# Altium PCB KUOZHAN.PCBDOC (part 4 of 21)
Units mm, origin at the board's own origin, x right, y up, seen from the top; angles counter-clockwise.
Board outline 165.51 x 116.38 mm, 2 copper layers (Top Layer, Bottom Layer); 171 components, 245 nets, 894 pads, 298 vias.
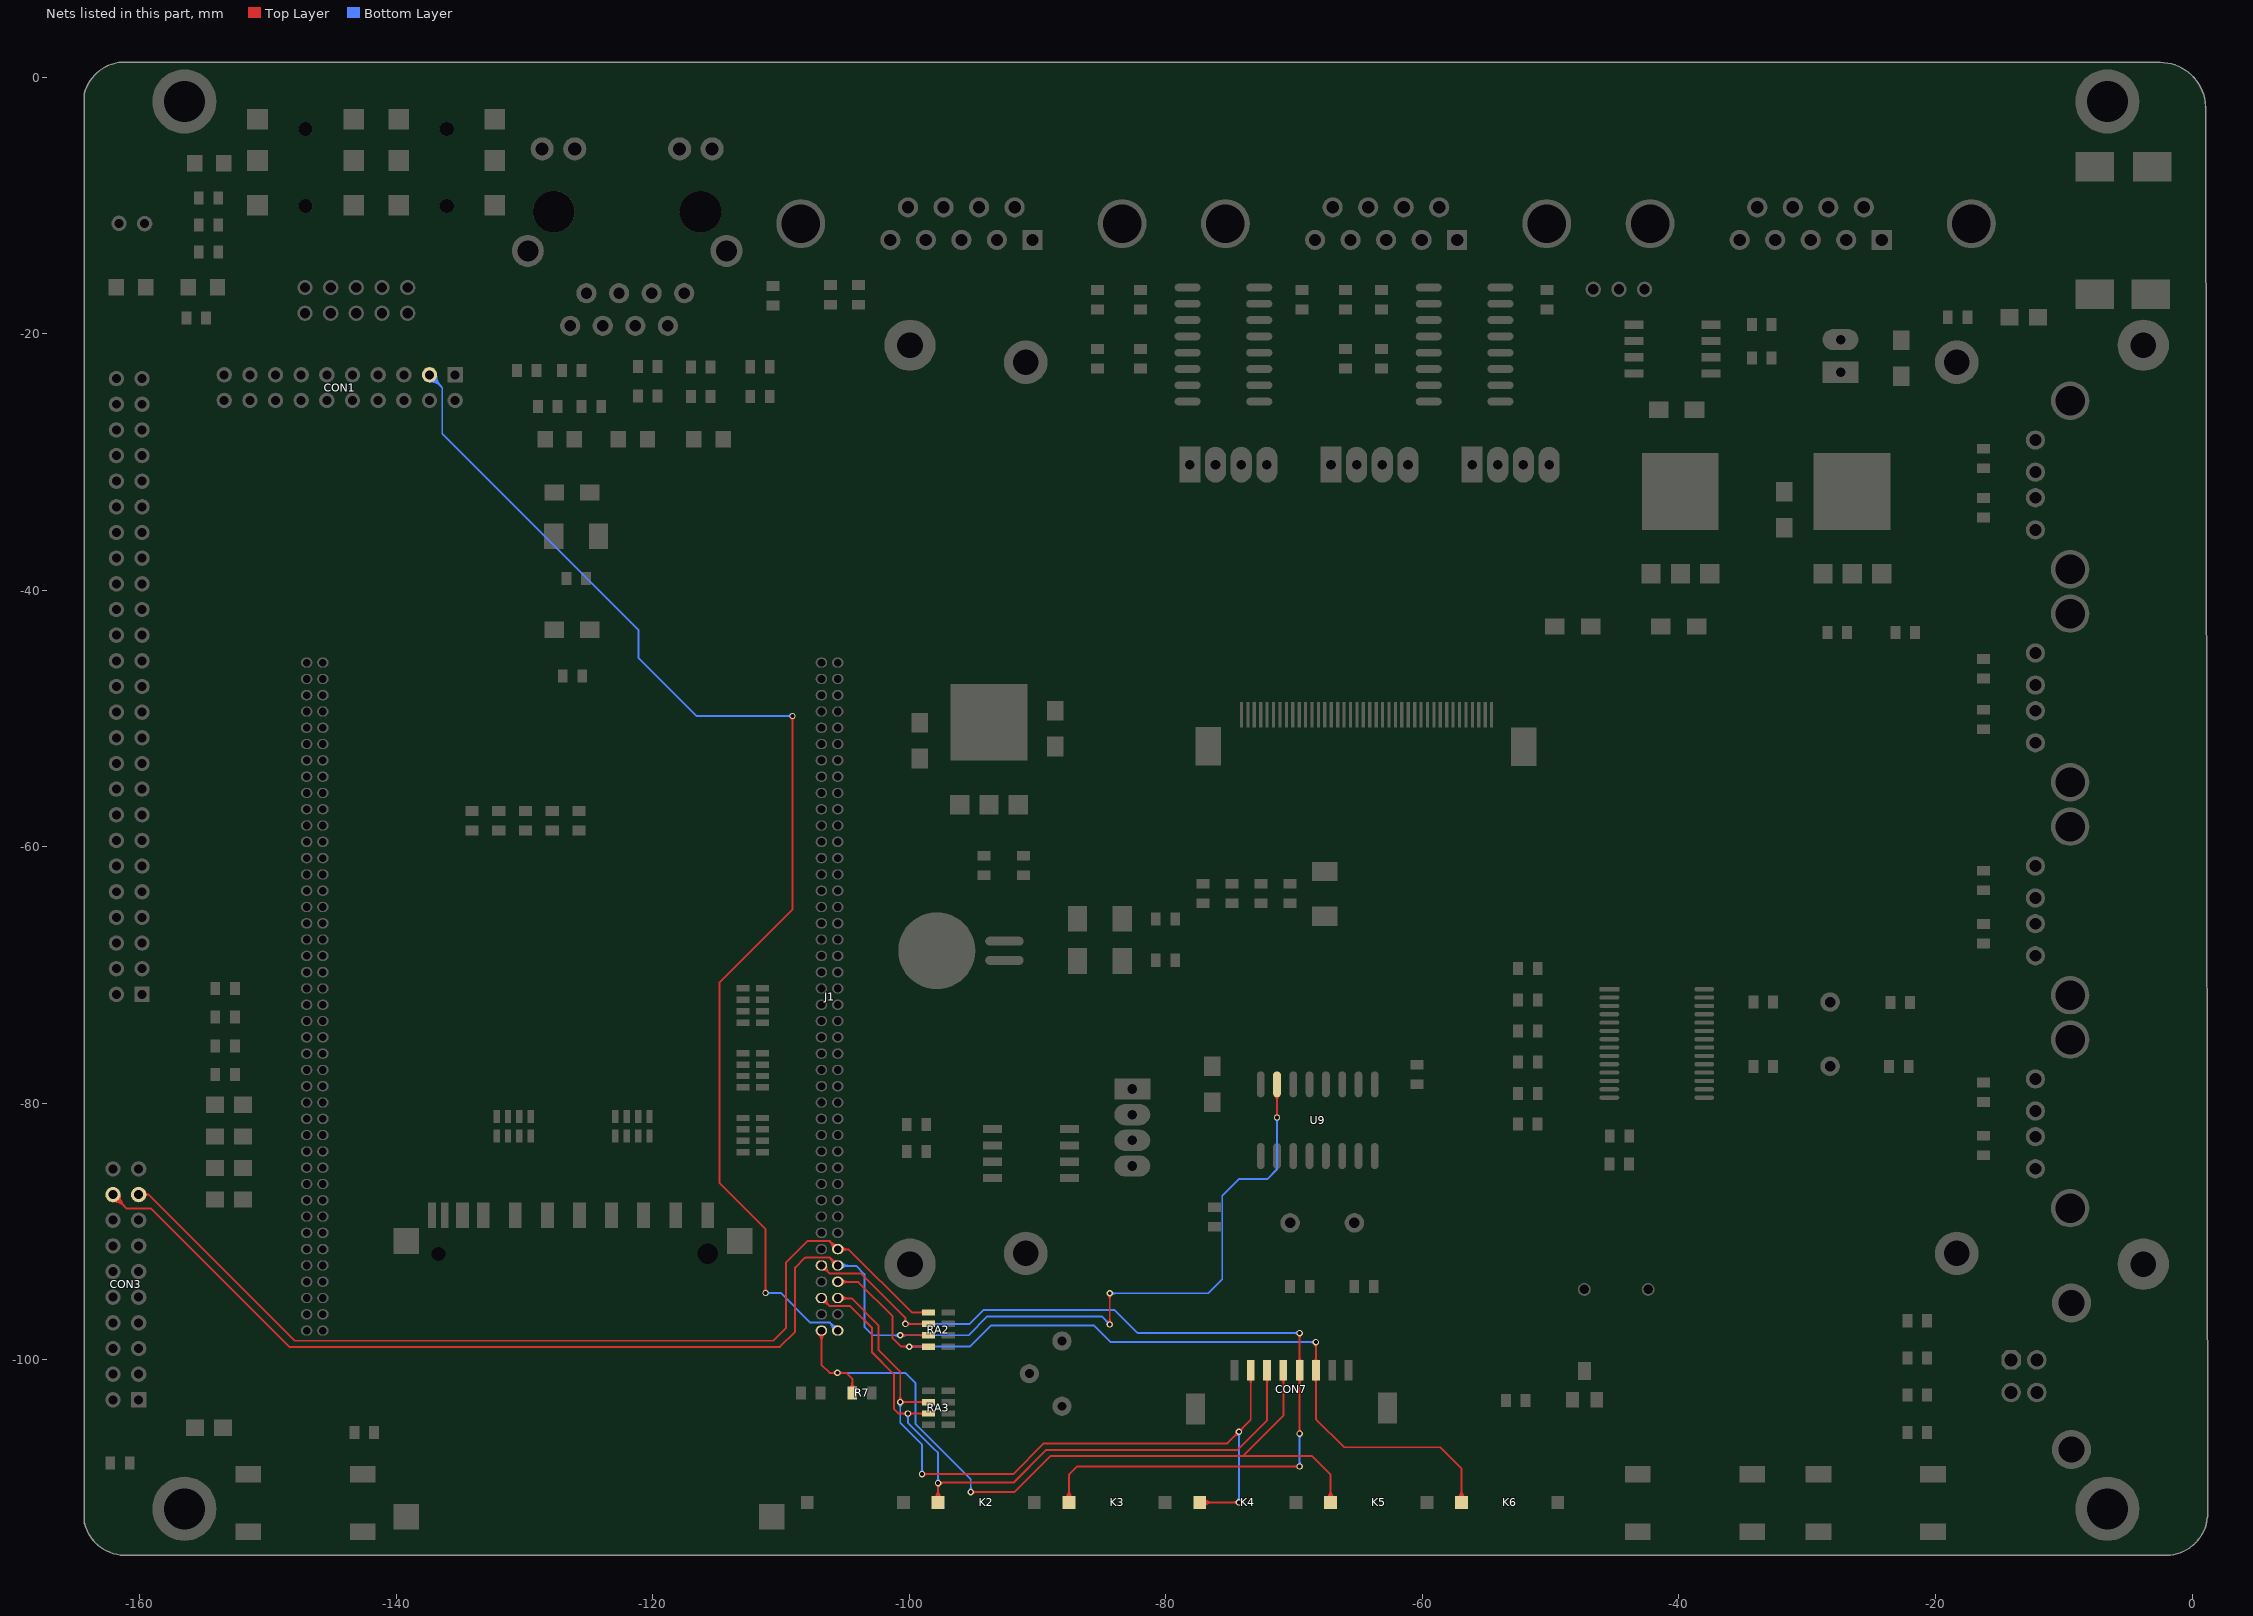
[diagram p4: the nets of this part, all layers, seen from the top]

## Via types
v1: diameter 0.5, hole 0.3, Top Layer to Bottom Layer, 272 vias
v2: diameter 0.6, hole 0.3, Top Layer to Bottom Layer, 24 vias
v3: diameter 0.9, hole 0.9, Top Layer to Bottom Layer, 2 vias

## Nets (pads, with @x,y where several pads share a name; then routed paths per layer and width w, separated by ;. In a path a pad name is that pad's centre, name@x,y a point inside that pad or via, vN(x,y) a via of type N, cw(c..) or ccw(c..) an arc to the next point about the centre after c; other vN are vias at no path point) (continued)
EINT11: CON7.3 J1.79 K2.1 RA3.3 | length 81.2
  Top Layer w0.15: J1.79@-106.841,-95.169 -106.21,-95.8 -104.6,-95.8 -104.478,-95.922 ; -104.551,-95.849 -104.478,-95.922 ; v1@-100.188,-104.262 ccw(c-100.402,-104.476) -100.402,-104.174 ccw(c-100.402,-103.872) v1@-100.188,-104.086 ; v1@-100.012,-104.262 cw(c-99.798,-104.476) -99.798,-104.174 cw(c-99.798,-103.872) v1@-100.012,-104.086 ; RA3.3@-98.48,-104.174 v1(-100.1,-104.174) -100.826,-104.174 -101.2,-103.8 -101.2,-101.1 -102.9,-99.4 -102.9,-97.5 -104.478,-95.922 ; K2.1@-98.051,-110.799 ccw(c-98.776,-110.074) -97.75,-110.074 ccw(c-96.724,-110.074) K2.1@-97.449,-110.799 ; K2.1@-97.944,-110.906 ccw(c-98.414,-110.436) -97.75,-110.436 ccw(c-97.086,-110.436) K2.1@-97.556,-110.906 ; v1@-97.874,-109.724 cw(c-98.172,-110.022) -97.75,-110.022 cw(c-97.328,-110.022) -97.626,-109.724 cw(c-97.207,-110.143) -97.207,-109.55 ; K2.1@-97.75,-111.1 -97.75,-109.55 -91.85,-109.55 -89.3,-107 -74.4,-107 -72.105,-104.705 CON7.3@-72.105,-100.788 ; v1@-97.626,-109.476 ccw(c-97.448,-109.298) -97.448,-109.55 ; J1.79@-106.841,-95.378 cw(c-106.841,-95.8) -106.542,-95.501 ; J1.79@-106.841,-95.378 cw(c-106.841,-95.8) -106.542,-95.501 ; J1.79@-106.841,-95.378 cw(c-106.841,-95.8) -106.542,-95.501 ; J1.79@-106.666,-95.203 ccw(c-106.243,-95.203) -106.542,-95.501 ; J1.79@-106.666,-95.203 ccw(c-106.243,-95.203) -106.542,-95.501 ; J1.79@-106.666,-95.203 ccw(c-106.243,-95.203) -106.542,-95.501 ; -100.522,-104.174 cw(c-100.522,-104.597) v1@-100.224,-104.298 ; -100.522,-104.174 ccw(c-100.522,-103.752) v1@-100.224,-104.05 ; -100.522,-104.174 cw(c-100.522,-104.597) v1@-100.224,-104.298 ; -100.522,-104.174 ccw(c-100.522,-103.752) v1@-100.224,-104.05 ; -100.522,-104.174 cw(c-100.522,-104.597) v1@-100.224,-104.298 ; -100.522,-104.174 ccw(c-100.522,-103.752) v1@-100.224,-104.05 ; -100.522,-104.174 ccw(c-100.522,-103.752) v1@-100.224,-104.05 ; -100.522,-104.174 cw(c-100.522,-104.597) v1@-100.224,-104.298 ; v1@-99.976,-104.298 cw(c-99.678,-104.597) -99.678,-104.174 ; v1@-99.976,-104.298 cw(c-99.678,-104.597) -99.678,-104.174 ; v1@-99.976,-104.298 cw(c-99.678,-104.597) -99.678,-104.174 ; v1@-99.976,-104.298 cw(c-99.678,-104.597) -99.678,-104.174 ; v1@-99.976,-104.05 ccw(c-99.678,-103.752) -99.678,-104.174 ; v1@-99.976,-104.05 ccw(c-99.678,-103.752) -99.678,-104.174 ; v1@-99.976,-104.05 ccw(c-99.678,-103.752) -99.678,-104.174 ; v1@-99.976,-104.05 ccw(c-99.678,-103.752) -99.678,-104.174 ; -99.161,-104.174 cw(c-99.161,-104.597) RA3.3@-98.862,-104.298 ; -99.161,-104.174 ccw(c-99.161,-103.752) RA3.3@-98.862,-104.05 ; -99.161,-104.174 cw(c-99.161,-104.597) RA3.3@-98.862,-104.298 ; -99.161,-104.174 ccw(c-99.161,-103.752) RA3.3@-98.862,-104.05 ; -99.161,-104.174 cw(c-99.161,-104.597) RA3.3@-98.862,-104.298 ; -99.161,-104.174 ccw(c-99.161,-103.752) RA3.3@-98.862,-104.05 ; -99.161,-104.174 cw(c-99.161,-104.597) RA3.3@-98.862,-104.298 ; -99.161,-104.174 ccw(c-99.161,-103.752) RA3.3@-98.862,-104.05 ; -99.161,-104.174 ccw(c-99.161,-103.752) RA3.3@-98.862,-104.05 ; -99.161,-104.174 cw(c-99.161,-104.597) RA3.3@-98.862,-104.298 ; CON7.3@-72.264,-101.447 cw(c-72.648,-101.831) -72.105,-101.831 ; CON7.3@-72.264,-101.447 cw(c-72.648,-101.831) -72.105,-101.831 ; CON7.3@-72.264,-101.447 cw(c-72.648,-101.831) -72.105,-101.831 ; CON7.3@-72.264,-101.447 cw(c-72.648,-101.831) -72.105,-101.831 ; CON7.3@-72.264,-101.447 cw(c-72.648,-101.831) -72.105,-101.831 ; -72.105,-101.831 cw(c-71.562,-101.831) CON7.3@-71.946,-101.447 ; -72.105,-101.831 cw(c-71.562,-101.831) CON7.3@-71.946,-101.447 ; -72.105,-101.831 cw(c-71.562,-101.831) CON7.3@-71.946,-101.447 ; -72.105,-101.831 cw(c-71.562,-101.831) CON7.3@-71.946,-101.447 ; -72.105,-101.831 cw(c-71.562,-101.831) CON7.3@-71.946,-101.447 ; J1.79@-106.791,-95.494 cw(c-106.791,-96.158) -106.321,-95.689 ccw(c-106.791,-96.158) J1.79@-106.791,-95.494 ; J1.79@-106.616,-95.177 ccw(c-106.14,-95.196) -106.477,-95.533 cw(c-106.14,-95.196) J1.79@-106.616,-95.177 ; J1.79@-106.466,-95.183 ccw(c-105.676,-95.216) -106.235,-95.775 cw(c-105.676,-95.216) J1.79@-106.466,-95.183
  Bottom Layer w0.15: v1@-100.188,-104.262 cw(c-100.402,-104.476) -100.1,-104.476 cw(c-99.798,-104.476) v1@-100.012,-104.262 ; v1(-100.1,-104.174) -100.1,-104.9 -98.1,-106.9 -97.75,-107.25 v1(-97.75,-109.6) ; v1@-97.874,-109.476 ccw(c-98.172,-109.178) -97.75,-109.178 ccw(c-97.328,-109.178) v1@-97.626,-109.476 ; v1@-100.224,-104.298 cw(c-100.522,-104.597) -100.1,-104.597 ; v1@-100.224,-104.298 cw(c-100.522,-104.597) -100.1,-104.597 ; v1@-100.224,-104.298 cw(c-100.522,-104.597) -100.1,-104.597 ; v1@-100.224,-104.298 cw(c-100.522,-104.597) -100.1,-104.597 ; -100.1,-104.597 cw(c-99.678,-104.597) v1@-99.976,-104.298 ; -100.1,-104.597 cw(c-99.678,-104.597) v1@-99.976,-104.298 ; -100.1,-104.597 cw(c-99.678,-104.597) v1@-99.976,-104.298 ; -100.1,-104.597 cw(c-99.678,-104.597) v1@-99.976,-104.298
EINT13: CON7.5 J1.75 K3.1 RA2.2 | length 111.3
  Top Layer w0.15: J1.75@-106.841,-92.629 -106.196,-93.274 -103.726,-93.274 -100.3,-96.7 v1(-100.3,-97.185) RA2.2@-98.48,-97.185 ; v1@-100.388,-97.097 ccw(c-100.602,-96.883) -100.3,-96.883 ccw(c-99.998,-96.883) -100.212,-97.097 ccw(c-99.998,-96.883) -99.998,-97.185 ccw(c-99.998,-97.487) v1@-100.212,-97.273 ; K3.1@-87.851,-110.799 ccw(c-88.576,-110.074) -87.55,-110.074 ccw(c-86.524,-110.074) K3.1@-87.249,-110.799 ; K3.1@-87.744,-110.906 ccw(c-88.214,-110.436) -87.55,-110.436 ccw(c-86.886,-110.436) K3.1@-87.356,-110.906 ; K3.1@-87.55,-111.1 -87.55,-108.95 -86.9,-108.3 v1(-69.565,-108.3) ; v1@-69.689,-108.424 ccw(c-69.987,-108.722) -69.987,-108.3 ccw(c-69.987,-107.878) v1@-69.689,-108.176 ; v1@-69.689,-105.611 ccw(c-69.987,-105.313) -69.565,-105.313 ccw(c-69.143,-105.313) v1@-69.441,-105.611 ; v1@-69.653,-97.988 cw(c-69.867,-98.202) -69.565,-98.202 cw(c-69.263,-98.202) v1@-69.477,-97.988 ; v1(-69.565,-105.735) CON7.5@-69.565,-100.788 v1(-69.565,-97.9) ; J1.75@-106.841,-92.836 cw(c-106.841,-93.258) -106.542,-92.96 ; J1.75@-106.841,-92.836 cw(c-106.841,-93.258) -106.542,-92.96 ; J1.75@-106.841,-92.836 cw(c-106.841,-93.258) -106.542,-92.96 ; J1.75@-106.666,-92.661 ccw(c-106.243,-92.661) -106.542,-92.96 ; J1.75@-106.666,-92.661 ccw(c-106.243,-92.661) -106.542,-92.96 ; J1.75@-106.666,-92.661 ccw(c-106.243,-92.661) -106.542,-92.96 ; v1@-100.424,-97.061 ccw(c-100.722,-96.763) -100.3,-96.763 ; v1@-100.424,-97.061 ccw(c-100.722,-96.763) -100.3,-96.763 ; v1@-100.424,-97.061 ccw(c-100.722,-96.763) -100.3,-96.763 ; v1@-100.424,-97.061 ccw(c-100.722,-96.763) -100.3,-96.763 ; -100.3,-96.763 ccw(c-99.878,-96.763) v1@-100.176,-97.061 ; -100.3,-96.763 ccw(c-99.878,-96.763) v1@-100.176,-97.061 ; -100.3,-96.763 ccw(c-99.878,-96.763) v1@-100.176,-97.061 ; -100.3,-96.763 ccw(c-99.878,-96.763) v1@-100.176,-97.061 ; v1@-100.176,-97.309 cw(c-99.878,-97.608) -99.878,-97.185 ; v1@-100.176,-97.309 cw(c-99.878,-97.608) -99.878,-97.185 ; v1@-100.176,-97.309 cw(c-99.878,-97.608) -99.878,-97.185 ; v1@-100.176,-97.309 cw(c-99.878,-97.608) -99.878,-97.185 ; v1@-100.176,-97.061 ccw(c-99.878,-96.763) -99.878,-97.185 ; v1@-100.176,-97.061 ccw(c-99.878,-96.763) -99.878,-97.185 ; v1@-100.176,-97.061 ccw(c-99.878,-96.763) -99.878,-97.185 ; v1@-100.176,-97.061 ccw(c-99.878,-96.763) -99.878,-97.185 ; -99.161,-97.185 cw(c-99.161,-97.608) RA2.2@-98.862,-97.309 ; -99.161,-97.185 ccw(c-99.161,-96.763) RA2.2@-98.862,-97.061 ; -99.161,-97.185 cw(c-99.161,-97.608) RA2.2@-98.862,-97.309 ; -99.161,-97.185 ccw(c-99.161,-96.763) RA2.2@-98.862,-97.061 ; -99.161,-97.185 cw(c-99.161,-97.608) RA2.2@-98.862,-97.309 ; -99.161,-97.185 ccw(c-99.161,-96.763) RA2.2@-98.862,-97.061 ; -99.161,-97.185 cw(c-99.161,-97.608) RA2.2@-98.862,-97.309 ; -99.161,-97.185 ccw(c-99.161,-96.763) RA2.2@-98.862,-97.061 ; -99.161,-97.185 ccw(c-99.161,-96.763) RA2.2@-98.862,-97.061 ; -99.161,-97.185 cw(c-99.161,-97.608) RA2.2@-98.862,-97.309 ; CON7.5@-69.724,-101.447 cw(c-70.108,-101.831) -69.565,-101.831 ; CON7.5@-69.724,-101.447 cw(c-70.108,-101.831) -69.565,-101.831 ; CON7.5@-69.724,-101.447 cw(c-70.108,-101.831) -69.565,-101.831 ; CON7.5@-69.724,-101.447 cw(c-70.108,-101.831) -69.565,-101.831 ; CON7.5@-69.724,-101.447 cw(c-70.108,-101.831) -69.565,-101.831 ; CON7.5@-69.724,-100.128 ccw(c-70.108,-99.744) -69.565,-99.744 ; CON7.5@-69.724,-100.128 ccw(c-70.108,-99.744) -69.565,-99.744 ; CON7.5@-69.724,-100.128 ccw(c-70.108,-99.744) -69.565,-99.744 ; CON7.5@-69.724,-100.128 ccw(c-70.108,-99.744) -69.565,-99.744 ; CON7.5@-69.724,-100.128 ccw(c-70.108,-99.744) -69.565,-99.744 ; v1@-69.689,-98.024 cw(c-69.987,-98.322) -69.565,-98.322 ; v1@-69.689,-98.024 cw(c-69.987,-98.322) -69.565,-98.322 ; v1@-69.689,-98.024 cw(c-69.987,-98.322) -69.565,-98.322 ; v1@-69.689,-98.024 cw(c-69.987,-98.322) -69.565,-98.322 ; -69.565,-101.831 cw(c-69.022,-101.831) CON7.5@-69.406,-101.447 ; -69.565,-101.831 cw(c-69.022,-101.831) CON7.5@-69.406,-101.447 ; -69.565,-101.831 cw(c-69.022,-101.831) CON7.5@-69.406,-101.447 ; -69.565,-101.831 cw(c-69.022,-101.831) CON7.5@-69.406,-101.447 ; -69.565,-101.831 cw(c-69.022,-101.831) CON7.5@-69.406,-101.447 ; -69.565,-99.744 ccw(c-69.022,-99.744) CON7.5@-69.406,-100.128 ; -69.565,-99.744 ccw(c-69.022,-99.744) CON7.5@-69.406,-100.128 ; -69.565,-99.744 ccw(c-69.022,-99.744) CON7.5@-69.406,-100.128 ; -69.565,-99.744 ccw(c-69.022,-99.744) CON7.5@-69.406,-100.128 ; -69.565,-99.744 ccw(c-69.022,-99.744) CON7.5@-69.406,-100.128 ; -69.565,-98.322 cw(c-69.143,-98.322) v1@-69.441,-98.024 ; -69.565,-98.322 cw(c-69.143,-98.322) v1@-69.441,-98.024 ; -69.565,-98.322 cw(c-69.143,-98.322) v1@-69.441,-98.024 ; -69.565,-98.322 cw(c-69.143,-98.322) v1@-69.441,-98.024 ; J1.75@-106.791,-92.954 cw(c-106.791,-93.618) -106.321,-93.149 ccw(c-106.791,-93.618) J1.75@-106.791,-92.954 ; J1.75@-106.616,-92.633 ccw(c-106.112,-92.646) -106.468,-93.002 cw(c-106.112,-92.646) J1.75@-106.616,-92.633 ; J1.75@-106.466,-92.637 ccw(c-105.629,-92.657) -106.221,-93.249 cw(c-105.629,-92.657) J1.75@-106.466,-92.637
  Bottom Layer w0.15: v1(-100.3,-97.185) -95.285,-97.185 -94.2,-96.1 -84,-96.1 -82.2,-97.9 v1(-69.565,-97.9) ; v1@-100.212,-97.273 cw(c-99.998,-97.487) -99.998,-97.185 cw(c-99.998,-96.883) v1@-100.212,-97.097 ; v1@-69.689,-108.176 ccw(c-69.987,-107.878) -69.565,-107.878 ccw(c-69.143,-107.878) v1@-69.441,-108.176 ; v1@-69.689,-105.859 cw(c-69.987,-106.157) -69.565,-106.157 cw(c-69.143,-106.157) v1@-69.441,-105.859 ; v1@-69.653,-97.988 ccw(c-69.867,-98.202) -69.867,-97.9 ccw(c-69.867,-97.598) v1@-69.653,-97.812 ; v1(-69.565,-108.3) v1(-69.565,-105.735) ; v1@-100.176,-97.309 cw(c-99.878,-97.608) -99.878,-97.185 ; v1@-100.176,-97.309 cw(c-99.878,-97.608) -99.878,-97.185 ; v1@-100.176,-97.309 cw(c-99.878,-97.608) -99.878,-97.185 ; v1@-100.176,-97.309 cw(c-99.878,-97.608) -99.878,-97.185 ; v1@-100.176,-97.061 ccw(c-99.878,-96.763) -99.878,-97.185 ; v1@-100.176,-97.061 ccw(c-99.878,-96.763) -99.878,-97.185 ; v1@-100.176,-97.061 ccw(c-99.878,-96.763) -99.878,-97.185 ; v1@-100.176,-97.061 ccw(c-99.878,-96.763) -99.878,-97.185 ; -69.987,-97.9 cw(c-69.987,-98.322) v1@-69.689,-98.024 ; -69.987,-97.9 ccw(c-69.987,-97.478) v1@-69.689,-97.776 ; -69.987,-97.9 cw(c-69.987,-98.322) v1@-69.689,-98.024 ; -69.987,-97.9 ccw(c-69.987,-97.478) v1@-69.689,-97.776 ; -69.987,-97.9 cw(c-69.987,-98.322) v1@-69.689,-98.024 ; -69.987,-97.9 ccw(c-69.987,-97.478) v1@-69.689,-97.776 ; -69.987,-97.9 ccw(c-69.987,-97.478) v1@-69.689,-97.776 ; -69.987,-97.9 cw(c-69.987,-98.322) v1@-69.689,-98.024
EINT14: CON7.2 J1.80 K4.1 RA3.2 | length 92.3
  Top Layer w0.15: J1.80@-105.571,-95.203 -104.497,-95.203 -102.4,-97.3 -102.4,-99.2 -100.7,-100.9 v1(-100.7,-103.285) RA3.2@-98.48,-103.285 ; v1@-100.788,-103.197 ccw(c-101.002,-102.983) -100.7,-102.983 ccw(c-100.398,-102.983) -100.612,-103.197 ccw(c-100.398,-102.983) -100.398,-103.285 ccw(c-100.398,-103.587) v1@-100.612,-103.373 ; v1(-99,-108.9) -91.9,-108.9 -89.5,-106.5 -75.2,-106.5 -73.375,-104.675 CON7.2@-73.375,-100.788 ; v1@-98.876,-109.024 cw(c-98.578,-109.322) -98.578,-108.9 cw(c-98.578,-108.478) v1@-98.876,-108.776 ; K4.1@-77.35,-111.1 v1(-74.3,-111.1) ; K4.1@-77.156,-111.294 cw(c-76.686,-111.764) -76.686,-111.1 cw(c-76.686,-110.436) K4.1@-77.156,-110.906 ; K4.1@-77.049,-111.401 cw(c-76.324,-112.126) -76.324,-111.1 cw(c-76.324,-110.074) K4.1@-77.049,-110.799 ; v1@-74.474,-105.599 cw(c-74.896,-105.599) -74.597,-105.897 cw(c-74.299,-106.196) v1@-74.299,-105.774 ; v1@-74.424,-111.224 ccw(c-74.722,-111.522) -74.722,-111.1 ccw(c-74.722,-110.678) v1@-74.424,-110.976 ; v1@-74.299,-105.424 ccw(c-74.299,-105.001) -74,-105.3 ccw(c-73.701,-105.599) v1@-74.124,-105.599 ; J1.80@-105.447,-95.326 cw(c-105.148,-95.625) J1.80@-105.148,-95.203 ; J1.80@-105.447,-95.326 cw(c-105.148,-95.625) J1.80@-105.148,-95.203 ; J1.80@-105.447,-95.326 cw(c-105.148,-95.625) J1.80@-105.148,-95.203 ; J1.80@-105.447,-95.079 ccw(c-105.148,-94.78) J1.80@-105.148,-95.203 ; J1.80@-105.447,-95.079 ccw(c-105.148,-94.78) J1.80@-105.148,-95.203 ; J1.80@-105.447,-95.079 ccw(c-105.148,-94.78) J1.80@-105.148,-95.203 ; J1.80@-105.341,-95.432 cw(c-104.786,-95.987) -104.786,-95.203 ; J1.80@-105.341,-95.432 cw(c-104.786,-95.987) -104.786,-95.203 ; J1.80@-105.341,-95.432 cw(c-104.786,-95.987) -104.786,-95.203 ; J1.80@-105.341,-94.973 ccw(c-104.786,-94.418) -104.786,-95.203 ; J1.80@-105.341,-94.973 ccw(c-104.786,-94.418) -104.786,-95.203 ; J1.80@-105.341,-94.973 ccw(c-104.786,-94.418) -104.786,-95.203 ; v1@-100.824,-103.161 ccw(c-101.122,-102.863) -100.7,-102.863 ; v1@-100.824,-103.161 ccw(c-101.122,-102.863) -100.7,-102.863 ; v1@-100.824,-103.161 ccw(c-101.122,-102.863) -100.7,-102.863 ; v1@-100.824,-103.161 ccw(c-101.122,-102.863) -100.7,-102.863 ; -100.7,-102.863 ccw(c-100.278,-102.863) v1@-100.576,-103.161 ; -100.7,-102.863 ccw(c-100.278,-102.863) v1@-100.576,-103.161 ; -100.7,-102.863 ccw(c-100.278,-102.863) v1@-100.576,-103.161 ; -100.7,-102.863 ccw(c-100.278,-102.863) v1@-100.576,-103.161 ; v1@-100.576,-103.409 cw(c-100.278,-103.708) -100.278,-103.285 ; v1@-100.576,-103.409 cw(c-100.278,-103.708) -100.278,-103.285 ; v1@-100.576,-103.409 cw(c-100.278,-103.708) -100.278,-103.285 ; v1@-100.576,-103.409 cw(c-100.278,-103.708) -100.278,-103.285 ; v1@-100.576,-103.161 ccw(c-100.278,-102.863) -100.278,-103.285 ; v1@-100.576,-103.161 ccw(c-100.278,-102.863) -100.278,-103.285 ; v1@-100.576,-103.161 ccw(c-100.278,-102.863) -100.278,-103.285 ; v1@-100.576,-103.161 ccw(c-100.278,-102.863) -100.278,-103.285 ; -99.161,-103.285 cw(c-99.161,-103.708) RA3.2@-98.862,-103.409 ; -99.161,-103.285 ccw(c-99.161,-102.863) RA3.2@-98.862,-103.161 ; -99.161,-103.285 cw(c-99.161,-103.708) RA3.2@-98.862,-103.409 ; -99.161,-103.285 ccw(c-99.161,-102.863) RA3.2@-98.862,-103.161 ; -99.161,-103.285 cw(c-99.161,-103.708) RA3.2@-98.862,-103.409 ; -99.161,-103.285 ccw(c-99.161,-102.863) RA3.2@-98.862,-103.161 ; -99.161,-103.285 cw(c-99.161,-103.708) RA3.2@-98.862,-103.409 ; -99.161,-103.285 ccw(c-99.161,-102.863) RA3.2@-98.862,-103.161 ; -99.161,-103.285 ccw(c-99.161,-102.863) RA3.2@-98.862,-103.161 ; -99.161,-103.285 cw(c-99.161,-103.708) RA3.2@-98.862,-103.409 ; CON7.2@-73.534,-101.447 cw(c-73.918,-101.831) -73.375,-101.831 ; CON7.2@-73.534,-101.447 cw(c-73.918,-101.831) -73.375,-101.831 ; CON7.2@-73.534,-101.447 cw(c-73.918,-101.831) -73.375,-101.831 ; CON7.2@-73.534,-101.447 cw(c-73.918,-101.831) -73.375,-101.831 ; CON7.2@-73.534,-101.447 cw(c-73.918,-101.831) -73.375,-101.831 ; -73.375,-101.831 cw(c-72.832,-101.831) CON7.2@-73.216,-101.447 ; -73.375,-101.831 cw(c-72.832,-101.831) CON7.2@-73.216,-101.447 ; -73.375,-101.831 cw(c-72.832,-101.831) CON7.2@-73.216,-101.447 ; -73.375,-101.831 cw(c-72.832,-101.831) CON7.2@-73.216,-101.447 ; -73.375,-101.831 cw(c-72.832,-101.831) CON7.2@-73.216,-101.447 ; J1.80@-105.397,-95.046 ccw(c-105.018,-94.666) -105.018,-95.203 cw(c-105.018,-94.666) J1.80@-105.397,-95.046 ; J1.80@-105.291,-95.399 cw(c-104.817,-95.873) -104.817,-95.203 ccw(c-104.817,-95.873) J1.80@-105.291,-95.399 ; J1.80@-105.291,-94.939 ccw(c-104.656,-94.304) -104.656,-95.203 cw(c-104.656,-94.304) J1.80@-105.291,-94.939
  Bottom Layer w0.15: v1@-100.788,-103.373 cw(c-101.002,-103.587) -100.7,-103.587 cw(c-100.398,-103.587) v1@-100.612,-103.373 ; v1(-100.7,-103.285) -100.7,-104.9 -99,-106.6 v1(-99,-108.9) ; v1@-99.124,-108.776 ccw(c-99.422,-108.478) -99,-108.478 ccw(c-98.578,-108.478) v1@-98.876,-108.776 ; v1@-74.424,-110.976 ccw(c-74.726,-110.674) -74.299,-110.674 ; v1@-74.422,-105.722 cw(c-74.721,-106.021) -74.299,-106.021 cw(c-73.876,-106.021) v1@-74.175,-105.722 ; v1@-74.299,-111.1 v1(-74.299,-105.599) ; -74.299,-110.681 ccw(c-73.881,-110.681) v1@-74.176,-110.976 ; v1@-100.824,-103.409 cw(c-101.122,-103.708) -100.7,-103.708 ; v1@-100.824,-103.409 cw(c-101.122,-103.708) -100.7,-103.708 ; v1@-100.824,-103.409 cw(c-101.122,-103.708) -100.7,-103.708 ; v1@-100.824,-103.409 cw(c-101.122,-103.708) -100.7,-103.708 ; -100.7,-103.708 cw(c-100.278,-103.708) v1@-100.576,-103.409 ; -100.7,-103.708 cw(c-100.278,-103.708) v1@-100.576,-103.409 ; -100.7,-103.708 cw(c-100.278,-103.708) v1@-100.576,-103.409 ; -100.7,-103.708 cw(c-100.278,-103.708) v1@-100.576,-103.409
EINT15: CON7.4 J1.83 K5.1 R7.2 | length 96.2
  Top Layer w0.15: J1.83@-106.841,-97.744 -106.841,-100.359 -106.2,-101 -104.9,-101 -104.437,-101.463 R7.2@-104.437,-102.56 ; v1@-105.688,-101.088 ccw(c-105.902,-101.302) -105.902,-101 ccw(c-105.902,-100.698) v1@-105.688,-100.912 ; v1@-105.512,-101.088 cw(c-105.298,-101.302) -105.298,-101 cw(c-105.298,-100.698) v1@-105.512,-100.912 ; v1(-95.2,-110.3) -91.8,-110.3 -89,-107.5 -74,-107.5 ; v1@-95.076,-110.424 cw(c-94.778,-110.722) -94.778,-110.3 cw(c-94.778,-109.878) v1@-95.076,-110.176 ; CON7.4@-70.835,-100.788 -70.835,-104.335 -74,-107.5 ; K5.1@-67.451,-110.799 ccw(c-68.176,-110.074) -67.15,-110.074 ccw(c-66.124,-110.074) K5.1@-66.849,-110.799 ; K5.1@-67.344,-110.906 ccw(c-67.814,-110.436) -67.15,-110.436 ccw(c-66.486,-110.436) K5.1@-66.956,-110.906 ; K5.1@-67.15,-111.1 -67.15,-108.95 -68.6,-107.5 -74,-107.5 ; J1.83@-107.071,-97.974 cw(c-107.625,-98.529) -106.841,-98.529 ; J1.83@-107.071,-97.974 cw(c-107.625,-98.529) -106.841,-98.529 ; J1.83@-107.071,-97.974 cw(c-107.625,-98.529) -106.841,-98.529 ; J1.83@-106.965,-97.868 cw(c-107.263,-98.167) -106.841,-98.167 ; J1.83@-106.965,-97.868 cw(c-107.263,-98.167) -106.841,-98.167 ; J1.83@-106.965,-97.868 cw(c-107.263,-98.167) -106.841,-98.167 ; -106.841,-98.529 cw(c-106.056,-98.529) J1.83@-106.611,-97.974 ; -106.841,-98.529 cw(c-106.056,-98.529) J1.83@-106.611,-97.974 ; -106.841,-98.529 cw(c-106.056,-98.529) J1.83@-106.611,-97.974 ; -106.841,-98.494 cw(c-106.056,-98.494) -106.611,-97.939 ccw(c-106.056,-98.494) -106.841,-98.494 ; -106.841,-98.494 ccw(c-107.625,-98.494) -107.071,-97.939 cw(c-107.625,-98.494) -106.841,-98.494 ; -106.841,-98.167 cw(c-106.418,-98.167) J1.83@-106.717,-97.868 ; -106.841,-98.167 cw(c-106.418,-98.167) J1.83@-106.717,-97.868 ; -106.841,-98.167 cw(c-106.418,-98.167) J1.83@-106.717,-97.868 ; -106.841,-98.132 cw(c-106.418,-98.132) -106.717,-97.833 ccw(c-106.418,-98.132) -106.841,-98.132 ; -106.841,-98.132 ccw(c-107.263,-98.132) -106.965,-97.833 cw(c-107.263,-98.132) -106.841,-98.132 ; -106.022,-101 cw(c-106.022,-101.422) v1@-105.724,-101.124 ; -106.022,-101 ccw(c-106.022,-100.578) v1@-105.724,-100.876 ; -106.022,-101 cw(c-106.022,-101.422) v1@-105.724,-101.124 ; -106.022,-101 ccw(c-106.022,-100.578) v1@-105.724,-100.876 ; -106.022,-101 cw(c-106.022,-101.422) v1@-105.724,-101.124 ; -106.022,-101 ccw(c-106.022,-100.578) v1@-105.724,-100.876 ; -106.022,-101 ccw(c-106.022,-100.578) v1@-105.724,-100.876 ; -106.022,-101 cw(c-106.022,-101.422) v1@-105.724,-101.124 ; v1@-105.476,-101.124 cw(c-105.178,-101.422) -105.178,-101 ; v1@-105.476,-101.124 cw(c-105.178,-101.422) -105.178,-101 ; v1@-105.476,-101.124 cw(c-105.178,-101.422) -105.178,-101 ; v1@-105.476,-101.124 cw(c-105.178,-101.422) -105.178,-101 ; v1@-105.476,-100.876 ccw(c-105.178,-100.578) -105.178,-101 ; v1@-105.476,-100.876 ccw(c-105.178,-100.578) -105.178,-101 ; v1@-105.476,-100.876 ccw(c-105.178,-100.578) -105.178,-101 ; v1@-105.476,-100.876 ccw(c-105.178,-100.578) -105.178,-101 ; R7.2@-104.653,-102.216 ccw(c-105.175,-101.694) -104.437,-101.694 ; R7.2@-104.653,-102.216 ccw(c-105.175,-101.694) -104.437,-101.694 ; R7.2@-104.653,-102.216 ccw(c-105.175,-101.694) -104.437,-101.694 ; R7.2@-104.653,-102.216 ccw(c-105.175,-101.694) -104.437,-101.694 ; R7.2@-104.653,-102.216 ccw(c-105.175,-101.694) -104.437,-101.694 ; -104.437,-101.694 ccw(c-103.698,-101.694) R7.2@-104.22,-102.216 ; -104.437,-101.694 ccw(c-103.698,-101.694) R7.2@-104.22,-102.216 ; -104.437,-101.694 ccw(c-103.698,-101.694) R7.2@-104.22,-102.216 ; -104.437,-101.694 ccw(c-103.698,-101.694) R7.2@-104.22,-102.216 ; -104.437,-101.694 ccw(c-103.698,-101.694) R7.2@-104.22,-102.216 ; CON7.4@-70.994,-101.447 cw(c-71.378,-101.831) -70.835,-101.831 ; CON7.4@-70.994,-101.447 cw(c-71.378,-101.831) -70.835,-101.831 ; CON7.4@-70.994,-101.447 cw(c-71.378,-101.831) -70.835,-101.831 ; CON7.4@-70.994,-101.447 cw(c-71.378,-101.831) -70.835,-101.831 ; CON7.4@-70.994,-101.447 cw(c-71.378,-101.831) -70.835,-101.831 ; -70.835,-101.831 cw(c-70.292,-101.831) CON7.4@-70.676,-101.447 ; -70.835,-101.831 cw(c-70.292,-101.831) CON7.4@-70.676,-101.447 ; -70.835,-101.831 cw(c-70.292,-101.831) CON7.4@-70.676,-101.447 ; -70.835,-101.831 cw(c-70.292,-101.831) CON7.4@-70.676,-101.447 ; -70.835,-101.831 cw(c-70.292,-101.831) CON7.4@-70.676,-101.447
  Bottom Layer w0.15: v1(-105.6,-101) -100.3,-101 -99.5,-101.8 -99.5,-105 -98,-106.5 -95.2,-109.3 v1(-95.2,-110.3) ; v1@-105.512,-101.088 cw(c-105.298,-101.302) -105.298,-101 cw(c-105.298,-100.698) v1@-105.512,-100.912 ; v1@-95.324,-110.176 ccw(c-95.622,-109.878) -95.2,-109.878 ccw(c-94.778,-109.878) v1@-95.076,-110.176 ; v1@-105.476,-101.124 cw(c-105.178,-101.422) -105.178,-101 ; v1@-105.476,-101.124 cw(c-105.178,-101.422) -105.178,-101 ; v1@-105.476,-101.124 cw(c-105.178,-101.422) -105.178,-101 ; v1@-105.476,-101.124 cw(c-105.178,-101.422) -105.178,-101 ; v1@-105.476,-100.876 ccw(c-105.178,-100.578) -105.178,-101 ; v1@-105.476,-100.876 ccw(c-105.178,-100.578) -105.178,-101 ; v1@-105.476,-100.876 ccw(c-105.178,-100.578) -105.178,-101 ; v1@-105.476,-100.876 ccw(c-105.178,-100.578) -105.178,-101
EINT17: CON3.17 J1.74 RA2.1 | length 103.7
  Top Layer w0.15: CON3.17@-160.067,-87.106 -159.294,-87.106 ; -107.944,-90.744 -109.6,-92.4 -109.6,-97.5 -110.6,-98.5 -147.9,-98.5 -159.294,-87.106 ; -107.914,-90.714 -106.216,-90.714 J1.74@-105.571,-91.359 ; -106.217,-90.744 -105.571,-91.39 -104.71,-91.39 -99.804,-96.296 RA2.1@-98.48,-96.296 ; CON3.17@-159.58,-87.3 cw(c-159.294,-87.414) -159.294,-87.106 ; CON3.17@-159.58,-87.3 cw(c-159.294,-87.414) -159.294,-87.106 ; CON3.17@-159.58,-87.3 cw(c-159.294,-87.414) -159.294,-87.106 ; CON3.17@-159.58,-87.3 cw(c-159.294,-87.414) -159.294,-87.106 ; CON3.17@-159.58,-87.3 cw(c-159.294,-87.414) -159.294,-87.106 ; CON3.17@-159.58,-86.912 ccw(c-159.294,-86.799) -159.294,-87.106 ; CON3.17@-159.58,-86.912 ccw(c-159.294,-86.799) -159.294,-87.106 ; CON3.17@-159.58,-86.912 ccw(c-159.294,-86.799) -159.294,-87.106 ; CON3.17@-159.58,-86.912 ccw(c-159.294,-86.799) -159.294,-87.106 ; CON3.17@-159.58,-86.912 ccw(c-159.294,-86.799) -159.294,-87.106 ; -106.126,-90.835 cw(c-106.68,-91.39) J1.74@-105.896,-91.39 ; -106.126,-90.835 ccw(c-105.571,-90.28) J1.74@-105.571,-91.065 ; -106.126,-90.835 cw(c-106.68,-91.39) J1.74@-105.896,-91.39 ; -106.126,-90.835 ccw(c-105.571,-90.28) J1.74@-105.571,-91.065 ; -106.126,-90.835 cw(c-106.68,-91.39) J1.74@-105.896,-91.39 ; -106.126,-90.835 ccw(c-105.571,-90.28) J1.74@-105.571,-91.065 ; J1.74@-105.946,-91.359 ccw(c-106.851,-91.359) -106.211,-90.719 cw(c-106.851,-91.359) J1.74@-105.946,-91.359 ; J1.74@-105.946,-91.359 ccw(c-106.777,-91.359) -106.189,-90.772 cw(c-106.777,-91.359) J1.74@-105.946,-91.359 ; J1.74@-105.87,-91.091 cw(c-106.168,-91.39) J1.74@-105.746,-91.39 ; J1.74@-105.87,-91.091 ccw(c-105.571,-90.793) J1.74@-105.571,-91.215 ; J1.74@-105.87,-91.091 cw(c-106.168,-91.39) J1.74@-105.746,-91.39 ; J1.74@-105.87,-91.091 ccw(c-105.571,-90.793) J1.74@-105.571,-91.215 ; J1.74@-105.87,-91.091 cw(c-106.168,-91.39) J1.74@-105.746,-91.39 ; J1.74@-105.87,-91.091 ccw(c-105.571,-90.793) J1.74@-105.571,-91.215 ; J1.74@-105.796,-91.359 ccw(c-106.339,-91.359) -105.955,-90.975 cw(c-106.339,-91.359) J1.74@-105.796,-91.359 ; J1.74@-105.796,-91.359 ccw(c-106.265,-91.359) -105.933,-91.028 cw(c-106.265,-91.359) J1.74@-105.796,-91.359 ; J1.74@-105.621,-91.034 cw(c-105.621,-90.37) -106.09,-90.84 ccw(c-105.621,-90.37) J1.74@-105.621,-91.034 ; J1.74@-105.621,-91.034 cw(c-105.621,-90.296) -106.143,-90.818 ccw(c-105.621,-90.296) J1.74@-105.621,-91.034 ; J1.74@-105.447,-91.514 cw(c-105.148,-91.813) J1.74@-105.148,-91.39 ; J1.74@-105.447,-91.514 cw(c-105.148,-91.813) J1.74@-105.148,-91.39 ; J1.74@-105.447,-91.514 cw(c-105.148,-91.813) J1.74@-105.148,-91.39 ; J1.74@-105.447,-91.266 ccw(c-105.148,-90.968) J1.74@-105.148,-91.39 ; J1.74@-105.447,-91.266 ccw(c-105.148,-90.968) J1.74@-105.148,-91.39 ; J1.74@-105.447,-91.266 ccw(c-105.148,-90.968) J1.74@-105.148,-91.39 ; J1.74@-105.341,-91.62 cw(c-104.786,-92.175) -104.786,-91.39 ; J1.74@-105.341,-91.62 cw(c-104.786,-92.175) -104.786,-91.39 ; J1.74@-105.341,-91.62 cw(c-104.786,-92.175) -104.786,-91.39 ; J1.74@-105.341,-91.16 ccw(c-104.786,-90.605) -104.786,-91.39 ; J1.74@-105.341,-91.16 ccw(c-104.786,-90.605) -104.786,-91.39 ; J1.74@-105.341,-91.16 ccw(c-104.786,-90.605) -104.786,-91.39 ; -99.161,-96.296 cw(c-99.161,-96.719) RA2.1@-98.862,-96.42 ; -99.161,-96.296 ccw(c-99.161,-95.874) RA2.1@-98.862,-96.172 ; -99.161,-96.296 cw(c-99.161,-96.719) RA2.1@-98.862,-96.42 ; -99.161,-96.296 ccw(c-99.161,-95.874) RA2.1@-98.862,-96.172 ; -99.161,-96.296 cw(c-99.161,-96.719) RA2.1@-98.862,-96.42 ; -99.161,-96.296 ccw(c-99.161,-95.874) RA2.1@-98.862,-96.172 ; -99.161,-96.296 cw(c-99.161,-96.719) RA2.1@-98.862,-96.42 ; -99.161,-96.296 ccw(c-99.161,-95.874) RA2.1@-98.862,-96.172 ; -99.161,-96.296 ccw(c-99.161,-95.874) RA2.1@-98.862,-96.172 ; -99.161,-96.296 cw(c-99.161,-96.719) RA2.1@-98.862,-96.42 ; J1.74@-105.392,-91.241 ccw(c-105.052,-90.928) -105.052,-91.39 cw(c-105.052,-90.928) J1.74@-105.392,-91.241 ; J1.74@-105.291,-91.589 cw(c-104.81,-92.07) -104.81,-91.39 ccw(c-104.81,-92.07) J1.74@-105.291,-91.589 ; J1.74@-105.282,-91.139 ccw(c-104.71,-90.613) -104.71,-91.39 cw(c-104.71,-90.613) J1.74@-105.282,-91.139
EINT18: CON3.18 J1.76 RA2.3 U9.15 | length 180.5
  Top Layer w0.15: CON3.18@-162.067,-87.106 -160.974,-88.2 -159.1,-88.2 -148.319,-98.981 -110.081,-98.981 -108.9,-97.8 -108.9,-92.8 -108.136,-92.036 ; -108.1,-92 -106.2,-92 J1.76@-105.571,-92.629 ; -106.196,-92.036 J1.76@-105.571,-92.661 ; v1(-100.7,-98.074) RA2.3@-98.48,-98.074 ; v1@-100.612,-98.162 cw(c-100.398,-98.376) -100.398,-98.074 cw(c-100.398,-97.772) v1@-100.612,-97.986 ; v1@-84.489,-97.111 ccw(c-84.788,-96.812) -84.366,-96.812 ccw(c-83.943,-96.812) v1@-84.242,-97.111 ; v1@-84.489,-94.924 cw(c-84.788,-95.222) -84.366,-95.222 cw(c-83.943,-95.222) v1@-84.242,-94.924 ; v1(-84.366,-97.234) v1(-84.366,-94.8) ; U9.15@-71.492,-79.386 cw(c-71.885,-79.778) -71.33,-79.778 cw(c-70.775,-79.778) U9.15@-71.168,-79.386 ; v1@-71.454,-80.976 ccw(c-71.752,-80.678) -71.33,-80.678 ccw(c-70.908,-80.678) v1@-71.206,-80.976 ; v1(-71.33,-81.1) U9.15@-71.33,-78.512 ; CON3.18@-162.067,-87.631 cw(c-162.067,-88.899) -161.171,-88.003 ; CON3.18@-162.067,-87.631 cw(c-162.067,-88.899) -161.171,-88.003 ; CON3.18@-162.067,-87.631 cw(c-162.067,-88.899) -161.171,-88.003 ; CON3.18@-162.067,-87.631 cw(c-162.067,-88.899) -161.171,-88.003 ; CON3.18@-162.067,-87.631 cw(c-162.067,-88.899) -161.171,-88.003 ; CON3.18@-162.067,-87.481 cw(c-162.067,-88.387) -161.427,-87.747 ; CON3.18@-162.067,-87.481 cw(c-162.067,-88.387) -161.427,-87.747 ; CON3.18@-162.067,-87.481 cw(c-162.067,-88.387) -161.427,-87.747 ; CON3.18@-162.067,-87.481 cw(c-162.067,-88.387) -161.427,-87.747 ; CON3.18@-162.067,-87.481 cw(c-162.067,-88.387) -161.427,-87.747 ; CON3.18@-161.692,-87.106 ccw(c-160.787,-87.106) -161.427,-87.747 ; CON3.18@-161.692,-87.106 ccw(c-160.787,-87.106) -161.427,-87.747 ; CON3.18@-161.692,-87.106 ccw(c-160.787,-87.106) -161.427,-87.747 ; CON3.18@-161.692,-87.106 ccw(c-160.787,-87.106) -161.427,-87.747 ; CON3.18@-161.692,-87.106 ccw(c-160.787,-87.106) -161.427,-87.747 ; CON3.18@-161.542,-87.106 ccw(c-160.275,-87.106) -161.171,-88.003 ; CON3.18@-161.542,-87.106 ccw(c-160.275,-87.106) -161.171,-88.003 ; CON3.18@-161.542,-87.106 ccw(c-160.275,-87.106) -161.171,-88.003 ; CON3.18@-161.542,-87.106 ccw(c-160.275,-87.106) -161.171,-88.003 ; CON3.18@-161.542,-87.106 ccw(c-160.275,-87.106) -161.171,-88.003 ; -106.126,-92.106 cw(c-106.68,-92.661) J1.76@-105.896,-92.661 ; -106.126,-92.106 ccw(c-105.571,-91.551) J1.76@-105.571,-92.336 ; -106.126,-92.106 cw(c-106.68,-92.661) J1.76@-105.896,-92.661 ; -106.126,-92.106 ccw(c-105.571,-91.551) J1.76@-105.571,-92.336 ; -106.126,-92.106 cw(c-106.68,-92.661) J1.76@-105.896,-92.661 ; -106.126,-92.106 ccw(c-105.571,-91.551) J1.76@-105.571,-92.336 ; J1.76@-105.946,-92.629 ccw(c-106.851,-92.629) -106.211,-91.989 cw(c-106.851,-92.629) J1.76@-105.946,-92.629 ; J1.76@-105.946,-92.629 ccw(c-106.775,-92.629) -106.189,-92.043 cw(c-106.775,-92.629) J1.76@-105.946,-92.629 ; J1.76@-105.87,-92.362 cw(c-106.168,-92.661) J1.76@-105.746,-92.661 ; J1.76@-105.87,-92.362 ccw(c-105.571,-92.063) J1.76@-105.571,-92.486 ; J1.76@-105.87,-92.362 cw(c-106.168,-92.661) J1.76@-105.746,-92.661 ; J1.76@-105.87,-92.362 ccw(c-105.571,-92.063) J1.76@-105.571,-92.486 ; J1.76@-105.87,-92.362 cw(c-106.168,-92.661) J1.76@-105.746,-92.661 ; J1.76@-105.87,-92.362 ccw(c-105.571,-92.063) J1.76@-105.571,-92.486 ; J1.76@-105.796,-92.629 ccw(c-106.339,-92.629) -105.955,-92.245 cw(c-106.339,-92.629) J1.76@-105.796,-92.629 ; J1.76@-105.796,-92.629 ccw(c-106.263,-92.629) -105.933,-92.299 cw(c-106.263,-92.629) J1.76@-105.796,-92.629 ; J1.76@-105.621,-92.304 cw(c-105.621,-91.64) -106.09,-92.11 ccw(c-105.621,-91.64) J1.76@-105.621,-92.304 ; J1.76@-105.621,-92.304 cw(c-105.621,-91.564) -106.144,-92.087 ccw(c-105.621,-91.564) J1.76@-105.621,-92.304 ; v1@-100.576,-98.198 cw(c-100.278,-98.497) -100.278,-98.074 ; v1@-100.576,-98.198 cw(c-100.278,-98.497) -100.278,-98.074 ; v1@-100.576,-98.198 cw(c-100.278,-98.497) -100.278,-98.074 ; v1@-100.576,-98.198 cw(c-100.278,-98.497) -100.278,-98.074 ; v1@-100.576,-97.95 ccw(c-100.278,-97.652) -100.278,-98.074 ; v1@-100.576,-97.95 ccw(c-100.278,-97.652) -100.278,-98.074 ; v1@-100.576,-97.95 ccw(c-100.278,-97.652) -100.278,-98.074 ; v1@-100.576,-97.95 ccw(c-100.278,-97.652) -100.278,-98.074 ; -99.161,-98.074 cw(c-99.161,-98.497) RA2.3@-98.862,-98.198 ; -99.161,-98.074 ccw(c-99.161,-97.652) RA2.3@-98.862,-97.95 ; -99.161,-98.074 cw(c-99.161,-98.497) RA2.3@-98.862,-98.198 ; -99.161,-98.074 ccw(c-99.161,-97.652) RA2.3@-98.862,-97.95 ; -99.161,-98.074 cw(c-99.161,-98.497) RA2.3@-98.862,-98.198 ; -99.161,-98.074 ccw(c-99.161,-97.652) RA2.3@-98.862,-97.95 ; -99.161,-98.074 cw(c-99.161,-98.497) RA2.3@-98.862,-98.198 ; -99.161,-98.074 ccw(c-99.161,-97.652) RA2.3@-98.862,-97.95 ; -99.161,-98.074 ccw(c-99.161,-97.652) RA2.3@-98.862,-97.95 ; -99.161,-98.074 cw(c-99.161,-98.497) RA2.3@-98.862,-98.198
  Bottom Layer w0.15: J1.76@-105.571,-92.661 -104.139,-92.661 -103.5,-93.3 -103.5,-97.4 -102.826,-98.074 v1(-100.7,-98.074) -95.374,-98.074 -93.9,-96.6 -85,-96.6 v1(-84.366,-97.234) ; v1@-100.788,-98.162 ccw(c-101.002,-98.376) -101.002,-98.074 ccw(c-101.002,-97.772) v1@-100.788,-97.986 ; v1@-100.576,-98.198 cw(c-100.278,-98.497) -100.278,-98.074 cw(c-100.278,-97.652) v1@-100.576,-97.95 ; v1@-84.541,-97.234 ccw(c-84.963,-97.234) -84.664,-96.936 ccw(c-84.366,-96.637) v1@-84.366,-97.059 ; v1(-84.366,-94.8) -76.7,-94.8 -75.6,-93.7 -75.6,-87.2 -74.3,-85.9 -72.1,-85.9 -71.33,-85.13 v1(-71.33,-81.1) ; v1@-84.242,-94.924 cw(c-83.943,-95.222) -83.943,-94.8 cw(c-83.943,-94.378) v1@-84.242,-94.676 ; v1@-71.454,-81.224 cw(c-71.752,-81.522) -71.33,-81.522 cw(c-70.908,-81.522) v1@-71.206,-81.224 ; J1.76@-105.447,-92.785 cw(c-105.148,-93.083) J1.76@-105.148,-92.661 ; J1.76@-105.447,-92.785 cw(c-105.148,-93.083) J1.76@-105.148,-92.661 ; J1.76@-105.447,-92.785 cw(c-105.148,-93.083) J1.76@-105.148,-92.661 ; J1.76@-105.447,-92.537 ccw(c-105.148,-92.238) J1.76@-105.148,-92.661 ; J1.76@-105.447,-92.537 ccw(c-105.148,-92.238) J1.76@-105.148,-92.661 ; J1.76@-105.447,-92.537 ccw(c-105.148,-92.238) J1.76@-105.148,-92.661 ; J1.76@-105.341,-92.891 cw(c-104.786,-93.446) -104.786,-92.661 ; J1.76@-105.341,-92.891 cw(c-104.786,-93.446) -104.786,-92.661 ; J1.76@-105.341,-92.891 cw(c-104.786,-93.446) -104.786,-92.661 ; J1.76@-105.341,-92.431 ccw(c-104.786,-91.876) -104.786,-92.661 ; J1.76@-105.341,-92.431 ccw(c-104.786,-91.876) -104.786,-92.661 ; J1.76@-105.341,-92.431 ccw(c-104.786,-91.876) -104.786,-92.661 ; -101.122,-98.074 cw(c-101.122,-98.497) v1@-100.824,-98.198 ; -101.122,-98.074 ccw(c-101.122,-97.652) v1@-100.824,-97.95 ; -101.122,-98.074 cw(c-101.122,-98.497) v1@-100.824,-98.198 ; -101.122,-98.074 ccw(c-101.122,-97.652) v1@-100.824,-97.95 ; -101.122,-98.074 cw(c-101.122,-98.497) v1@-100.824,-98.198 ; -101.122,-98.074 ccw(c-101.122,-97.652) v1@-100.824,-97.95 ; -101.122,-98.074 ccw(c-101.122,-97.652) v1@-100.824,-97.95 ; -101.122,-98.074 cw(c-101.122,-98.497) v1@-100.824,-98.198 ; J1.76@-105.397,-92.506 ccw(c-105.022,-92.131) -105.022,-92.661 cw(c-105.022,-92.131) J1.76@-105.397,-92.506 ; J1.76@-105.291,-92.859 cw(c-104.812,-93.338) -104.812,-92.661 ccw(c-104.812,-93.338) J1.76@-105.291,-92.859 ; J1.76@-105.291,-92.399 ccw(c-104.66,-91.768) -104.66,-92.661 cw(c-104.66,-91.768) J1.76@-105.291,-92.399
EINT19: CON7.6 J1.78 K6.1 RA2.4 | length 103.8
  Top Layer w0.15: J1.78@-105.571,-93.932 -103.968,-93.932 -101.3,-96.6 -101.3,-98.3 -100.637,-98.963 v1(-100,-98.963) RA2.4@-98.48,-98.963 ; v1@-100.088,-99.051 ccw(c-100.302,-99.265) -100.302,-98.963 ccw(c-100.302,-98.661) v1@-100.088,-98.875 ; v1@-99.912,-99.051 cw(c-99.698,-99.265) -99.698,-98.963 cw(c-99.698,-98.661) v1@-99.912,-98.875 ; v1@-68.383,-98.693 cw(c-68.597,-98.907) -68.295,-98.907 cw(c-67.993,-98.907) v1@-68.207,-98.693 ; v1(-68.295,-98.605) CON7.6@-68.295,-100.788 -68.295,-104.605 -66.1,-106.8 -58.6,-106.8 -56.95,-108.45 K6.1@-56.95,-111.1 ; K6.1@-57.251,-110.799 ccw(c-57.976,-110.074) -56.95,-110.074 ccw(c-55.924,-110.074) K6.1@-56.649,-110.799 ; K6.1@-57.144,-110.906 ccw(c-57.614,-110.436) -56.95,-110.436 ccw(c-56.286,-110.436) K6.1@-56.756,-110.906 ; J1.78@-105.447,-94.056 cw(c-105.148,-94.354) J1.78@-105.148,-93.932 ; J1.78@-105.447,-94.056 cw(c-105.148,-94.354) J1.78@-105.148,-93.932 ; J1.78@-105.447,-94.056 cw(c-105.148,-94.354) J1.78@-105.148,-93.932 ; J1.78@-105.447,-93.808 ccw(c-105.148,-93.509) J1.78@-105.148,-93.932 ; J1.78@-105.447,-93.808 ccw(c-105.148,-93.509) J1.78@-105.148,-93.932 ; J1.78@-105.447,-93.808 ccw(c-105.148,-93.509) J1.78@-105.148,-93.932 ; J1.78@-105.341,-94.162 cw(c-104.786,-94.716) -104.786,-93.932 ; J1.78@-105.341,-94.162 cw(c-104.786,-94.716) -104.786,-93.932 ; J1.78@-105.341,-94.162 cw(c-104.786,-94.716) -104.786,-93.932 ; J1.78@-105.341,-93.702 ccw(c-104.786,-93.147) -104.786,-93.932 ; J1.78@-105.341,-93.702 ccw(c-104.786,-93.147) -104.786,-93.932 ; J1.78@-105.341,-93.702 ccw(c-104.786,-93.147) -104.786,-93.932 ; -100.422,-98.963 cw(c-100.422,-99.386) v1@-100.124,-99.087 ; -100.422,-98.963 ccw(c-100.422,-98.541) v1@-100.124,-98.839 ; -100.422,-98.963 cw(c-100.422,-99.386) v1@-100.124,-99.087 ; -100.422,-98.963 ccw(c-100.422,-98.541) v1@-100.124,-98.839 ; -100.422,-98.963 cw(c-100.422,-99.386) v1@-100.124,-99.087 ; -100.422,-98.963 ccw(c-100.422,-98.541) v1@-100.124,-98.839 ; -100.422,-98.963 ccw(c-100.422,-98.541) v1@-100.124,-98.839 ; -100.422,-98.963 cw(c-100.422,-99.386) v1@-100.124,-99.087 ; v1@-99.876,-99.087 cw(c-99.578,-99.386) -99.578,-98.963 ; v1@-99.876,-99.087 cw(c-99.578,-99.386) -99.578,-98.963 ; v1@-99.876,-99.087 cw(c-99.578,-99.386) -99.578,-98.963 ; v1@-99.876,-99.087 cw(c-99.578,-99.386) -99.578,-98.963 ; v1@-99.876,-98.839 ccw(c-99.578,-98.541) -99.578,-98.963 ; v1@-99.876,-98.839 ccw(c-99.578,-98.541) -99.578,-98.963 ; v1@-99.876,-98.839 ccw(c-99.578,-98.541) -99.578,-98.963 ; v1@-99.876,-98.839 ccw(c-99.578,-98.541) -99.578,-98.963 ; -99.161,-98.963 cw(c-99.161,-99.386) RA2.4@-98.862,-99.087 ; -99.161,-98.963 ccw(c-99.161,-98.541) RA2.4@-98.862,-98.839 ; -99.161,-98.963 cw(c-99.161,-99.386) RA2.4@-98.862,-99.087 ; -99.161,-98.963 ccw(c-99.161,-98.541) RA2.4@-98.862,-98.839 ; -99.161,-98.963 cw(c-99.161,-99.386) RA2.4@-98.862,-99.087 ; -99.161,-98.963 ccw(c-99.161,-98.541) RA2.4@-98.862,-98.839 ; -99.161,-98.963 cw(c-99.161,-99.386) RA2.4@-98.862,-99.087 ; -99.161,-98.963 ccw(c-99.161,-98.541) RA2.4@-98.862,-98.839 ; -99.161,-98.963 ccw(c-99.161,-98.541) RA2.4@-98.862,-98.839 ; -99.161,-98.963 cw(c-99.161,-99.386) RA2.4@-98.862,-99.087 ; CON7.6@-68.454,-101.447 cw(c-68.838,-101.831) -68.295,-101.831 ; CON7.6@-68.454,-101.447 cw(c-68.838,-101.831) -68.295,-101.831 ; CON7.6@-68.454,-101.447 cw(c-68.838,-101.831) -68.295,-101.831 ; CON7.6@-68.454,-101.447 cw(c-68.838,-101.831) -68.295,-101.831 ; CON7.6@-68.454,-101.447 cw(c-68.838,-101.831) -68.295,-101.831 ; CON7.6@-68.454,-100.128 ccw(c-68.838,-99.744) -68.295,-99.744 ; CON7.6@-68.454,-100.128 ccw(c-68.838,-99.744) -68.295,-99.744 ; CON7.6@-68.454,-100.128 ccw(c-68.838,-99.744) -68.295,-99.744 ; CON7.6@-68.454,-100.128 ccw(c-68.838,-99.744) -68.295,-99.744 ; CON7.6@-68.454,-100.128 ccw(c-68.838,-99.744) -68.295,-99.744 ; v1@-68.419,-98.729 cw(c-68.717,-99.027) -68.295,-99.027 ; v1@-68.419,-98.729 cw(c-68.717,-99.027) -68.295,-99.027 ; v1@-68.419,-98.729 cw(c-68.717,-99.027) -68.295,-99.027 ; v1@-68.419,-98.729 cw(c-68.717,-99.027) -68.295,-99.027 ; -68.295,-101.831 cw(c-67.752,-101.831) CON7.6@-68.136,-101.447 ; -68.295,-101.831 cw(c-67.752,-101.831) CON7.6@-68.136,-101.447 ; -68.295,-101.831 cw(c-67.752,-101.831) CON7.6@-68.136,-101.447 ; -68.295,-101.831 cw(c-67.752,-101.831) CON7.6@-68.136,-101.447 ; -68.295,-101.831 cw(c-67.752,-101.831) CON7.6@-68.136,-101.447 ; -68.295,-99.744 ccw(c-67.752,-99.744) CON7.6@-68.136,-100.128 ; -68.295,-99.744 ccw(c-67.752,-99.744) CON7.6@-68.136,-100.128 ; -68.295,-99.744 ccw(c-67.752,-99.744) CON7.6@-68.136,-100.128 ; -68.295,-99.744 ccw(c-67.752,-99.744) CON7.6@-68.136,-100.128 ; -68.295,-99.744 ccw(c-67.752,-99.744) CON7.6@-68.136,-100.128 ; -68.295,-99.027 cw(c-67.873,-99.027) v1@-68.171,-98.729 ; -68.295,-99.027 cw(c-67.873,-99.027) v1@-68.171,-98.729 ; -68.295,-99.027 cw(c-67.873,-99.027) v1@-68.171,-98.729 ; -68.295,-99.027 cw(c-67.873,-99.027) v1@-68.171,-98.729 ; J1.78@-105.397,-93.776 ccw(c-105.02,-93.398) -105.02,-93.932 cw(c-105.02,-93.398) J1.78@-105.397,-93.776 ; J1.78@-105.291,-94.129 cw(c-104.815,-94.605) -104.815,-93.932 ccw(c-104.815,-94.605) J1.78@-105.291,-94.129 ; J1.78@-105.291,-93.669 ccw(c-104.658,-93.036) -104.658,-93.932 cw(c-104.658,-93.036) J1.78@-105.291,-93.669
  Bottom Layer w0.15: v1(-100,-98.963) -95.263,-98.963 -93.6,-97.3 -85.6,-97.3 -84.3,-98.6 v1@-68.295,-98.6 ; v1@-99.912,-99.051 cw(c-99.698,-99.265) -99.698,-98.963 cw(c-99.698,-98.661) v1@-99.912,-98.875 ; -68.609,-98.6 cw(c-68.609,-98.919) v1@-68.383,-98.693 ; -68.585,-98.6 ccw(c-68.585,-98.315) v1@-68.383,-98.517 ; v1@-99.876,-99.087 cw(c-99.578,-99.386) -99.578,-98.963 ; v1@-99.876,-99.087 cw(c-99.578,-99.386) -99.578,-98.963 ; v1@-99.876,-99.087 cw(c-99.578,-99.386) -99.578,-98.963 ; v1@-99.876,-99.087 cw(c-99.578,-99.386) -99.578,-98.963 ; v1@-99.876,-98.839 ccw(c-99.578,-98.541) -99.578,-98.963 ; v1@-99.876,-98.839 ccw(c-99.578,-98.541) -99.578,-98.963 ; v1@-99.876,-98.839 ccw(c-99.578,-98.541) -99.578,-98.963 ; v1@-99.876,-98.839 ccw(c-99.578,-98.541) -99.578,-98.963 ; -68.73,-98.6 cw(c-68.73,-99.04) v1@-68.419,-98.729 ; -68.73,-98.6 cw(c-68.73,-99.04) v1@-68.419,-98.729 ; -68.73,-98.6 cw(c-68.73,-99.04) v1@-68.419,-98.729 ; -68.73,-98.6 cw(c-68.73,-99.04) v1@-68.419,-98.729 ; -68.705,-98.6 ccw(c-68.705,-98.195) v1@-68.419,-98.481 ; -68.705,-98.6 ccw(c-68.705,-98.195) v1@-68.419,-98.481 ; -68.705,-98.6 ccw(c-68.705,-98.195) v1@-68.419,-98.481 ; -68.705,-98.6 ccw(c-68.705,-98.195) v1@-68.419,-98.481
EINT20: CON1.3 J1.84 | length 131
  Top Layer w0.15: v1(-111.2,-94.778) -111.2,-89.8 -114.8,-86.2 -114.8,-70.6 -109.1,-64.9 v1(-109.1,-49.8) ; v1@-109.188,-49.888 cw(c-109.402,-50.102) -109.1,-50.102 cw(c-108.798,-50.102) v1@-109.012,-49.888 ; v1@-111.324,-94.654 ccw(c-111.622,-94.355) -111.2,-94.355 ; v1@-111.324,-94.654 ccw(c-111.622,-94.355) -111.2,-94.355 ; v1@-111.324,-94.654 ccw(c-111.622,-94.355) -111.2,-94.355 ; -111.2,-94.355 ccw(c-110.778,-94.355) v1@-111.076,-94.654 ; -111.2,-94.355 ccw(c-110.778,-94.355) v1@-111.076,-94.654 ; -111.2,-94.355 ccw(c-110.778,-94.355) v1@-111.076,-94.654 ; v1@-109.224,-49.924 cw(c-109.522,-50.222) -109.1,-50.222 ; v1@-109.224,-49.924 cw(c-109.522,-50.222) -109.1,-50.222 ; v1@-109.224,-49.924 cw(c-109.522,-50.222) -109.1,-50.222 ; v1@-109.224,-49.924 cw(c-109.522,-50.222) -109.1,-50.222 ; -109.1,-50.222 cw(c-108.678,-50.222) v1@-108.976,-49.924 ; -109.1,-50.222 cw(c-108.678,-50.222) v1@-108.976,-49.924 ; -109.1,-50.222 cw(c-108.678,-50.222) v1@-108.976,-49.924 ; -109.1,-50.222 cw(c-108.678,-50.222) v1@-108.976,-49.924
  Bottom Layer w0.15: CON1.3@-137.394,-23.203 -136.4,-24.196 -136.4,-27.806 -121.1,-43.106 -121.1,-45.3 -116.6,-49.8 v1(-109.1,-49.8) ; v1(-111.2,-94.778) -110.022,-94.778 -107.716,-97.084 -106.196,-97.084 J1.84@-105.571,-97.709 ; v1@-109.188,-49.888 ccw(c-109.402,-50.102) -109.402,-49.8 ccw(c-109.402,-49.498) v1@-109.188,-49.712 ; CON1.3@-137.394,-23.728 cw(c-137.394,-24.995) -136.497,-24.099 ; CON1.3@-137.394,-23.728 cw(c-137.394,-24.995) -136.497,-24.099 ; CON1.3@-137.394,-23.728 cw(c-137.394,-24.995) -136.497,-24.099 ; CON1.3@-137.394,-23.728 cw(c-137.394,-24.995) -136.497,-24.099 ; CON1.3@-137.394,-23.728 cw(c-137.394,-24.995) -136.497,-24.099 ; CON1.3@-137.394,-23.578 cw(c-137.394,-24.483) -136.753,-23.843 ; CON1.3@-137.394,-23.578 cw(c-137.394,-24.483) -136.753,-23.843 ; CON1.3@-137.394,-23.578 cw(c-137.394,-24.483) -136.753,-23.843 ; CON1.3@-137.394,-23.578 cw(c-137.394,-24.483) -136.753,-23.843 ; CON1.3@-137.394,-23.578 cw(c-137.394,-24.483) -136.753,-23.843 ; CON1.3@-137.019,-23.203 ccw(c-136.113,-23.203) -136.753,-23.843 ; CON1.3@-137.019,-23.203 ccw(c-136.113,-23.203) -136.753,-23.843 ; CON1.3@-137.019,-23.203 ccw(c-136.113,-23.203) -136.753,-23.843 ; CON1.3@-137.019,-23.203 ccw(c-136.113,-23.203) -136.753,-23.843 ; CON1.3@-137.019,-23.203 ccw(c-136.113,-23.203) -136.753,-23.843 ; CON1.3@-136.869,-23.203 ccw(c-135.601,-23.203) -136.497,-24.099 ; CON1.3@-136.869,-23.203 ccw(c-135.601,-23.203) -136.497,-24.099 ; CON1.3@-136.869,-23.203 ccw(c-135.601,-23.203) -136.497,-24.099 ; CON1.3@-136.869,-23.203 ccw(c-135.601,-23.203) -136.497,-24.099 ; CON1.3@-136.869,-23.203 ccw(c-135.601,-23.203) -136.497,-24.099 ; v1@-111.076,-94.901 cw(c-110.778,-95.2) -110.778,-94.778 ; v1@-111.076,-94.901 cw(c-110.778,-95.2) -110.778,-94.778 ; v1@-111.076,-94.901 cw(c-110.778,-95.2) -110.778,-94.778 ; v1@-111.076,-94.654 ccw(c-110.778,-94.355) -110.778,-94.778 ; v1@-111.076,-94.654 ccw(c-110.778,-94.355) -110.778,-94.778 ; v1@-111.076,-94.654 ccw(c-110.778,-94.355) -110.778,-94.778 ; -109.522,-49.8 cw(c-109.522,-50.222) v1@-109.224,-49.924 ; -109.522,-49.8 ccw(c-109.522,-49.378) v1@-109.224,-49.676 ; -109.522,-49.8 cw(c-109.522,-50.222) v1@-109.224,-49.924 ; -109.522,-49.8 ccw(c-109.522,-49.378) v1@-109.224,-49.676 ; -109.522,-49.8 cw(c-109.522,-50.222) v1@-109.224,-49.924 ; -109.522,-49.8 ccw(c-109.522,-49.378) v1@-109.224,-49.676 ; -109.522,-49.8 ccw(c-109.522,-49.378) v1@-109.224,-49.676 ; -109.522,-49.8 cw(c-109.522,-50.222) v1@-109.224,-49.924 ; J1.84@-105.87,-97.446 cw(c-106.168,-97.744) J1.84@-105.746,-97.744 ; J1.84@-105.87,-97.446 ccw(c-105.571,-97.147) J1.84@-105.571,-97.569 ; J1.84@-105.87,-97.446 cw(c-106.168,-97.744) J1.84@-105.746,-97.744 ; J1.84@-105.87,-97.446 ccw(c-105.571,-97.147) J1.84@-105.571,-97.569 ; J1.84@-105.87,-97.446 cw(c-106.168,-97.744) J1.84@-105.746,-97.744 ; J1.84@-105.87,-97.446 ccw(c-105.571,-97.147) J1.84@-105.571,-97.569 ; -106.211,-97.069 cw(c-106.851,-97.709) -105.946,-97.709 ccw(c-106.851,-97.709) -106.211,-97.069 ; -106.09,-97.19 ccw(c-105.621,-96.72) -105.621,-97.384 cw(c-105.621,-96.72) -106.09,-97.19 ; -105.955,-97.325 cw(c-106.339,-97.709) -105.796,-97.709 ccw(c-106.339,-97.709) -105.955,-97.325